# Altium PCB SmartChess_PCB.PcbDoc
Units mm, origin at the board's own origin, x right, y up, seen from the top; angles counter-clockwise.
Board outline 152.4 x 101.6 mm, 2 copper layers (Top Layer, Bottom Layer); 40 components, 108 nets, 335 pads, 68 vias.
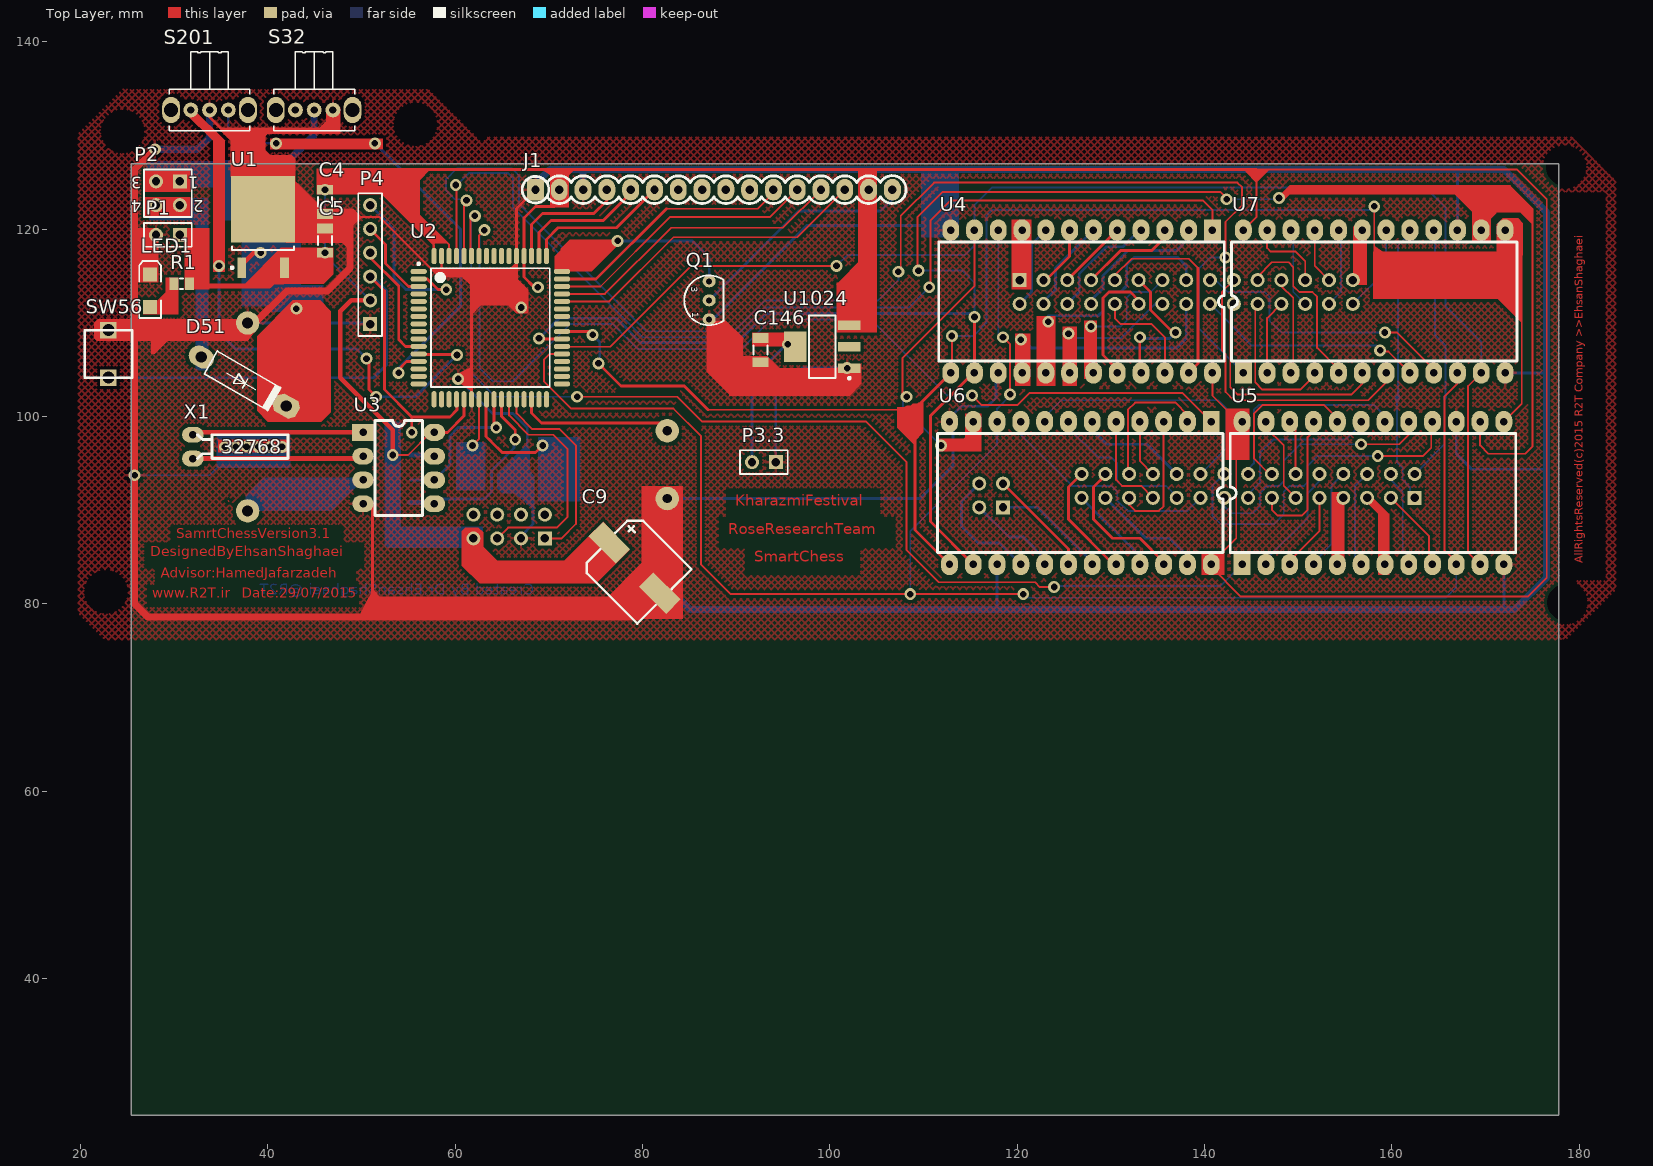
[diagram p0: Top Layer view]
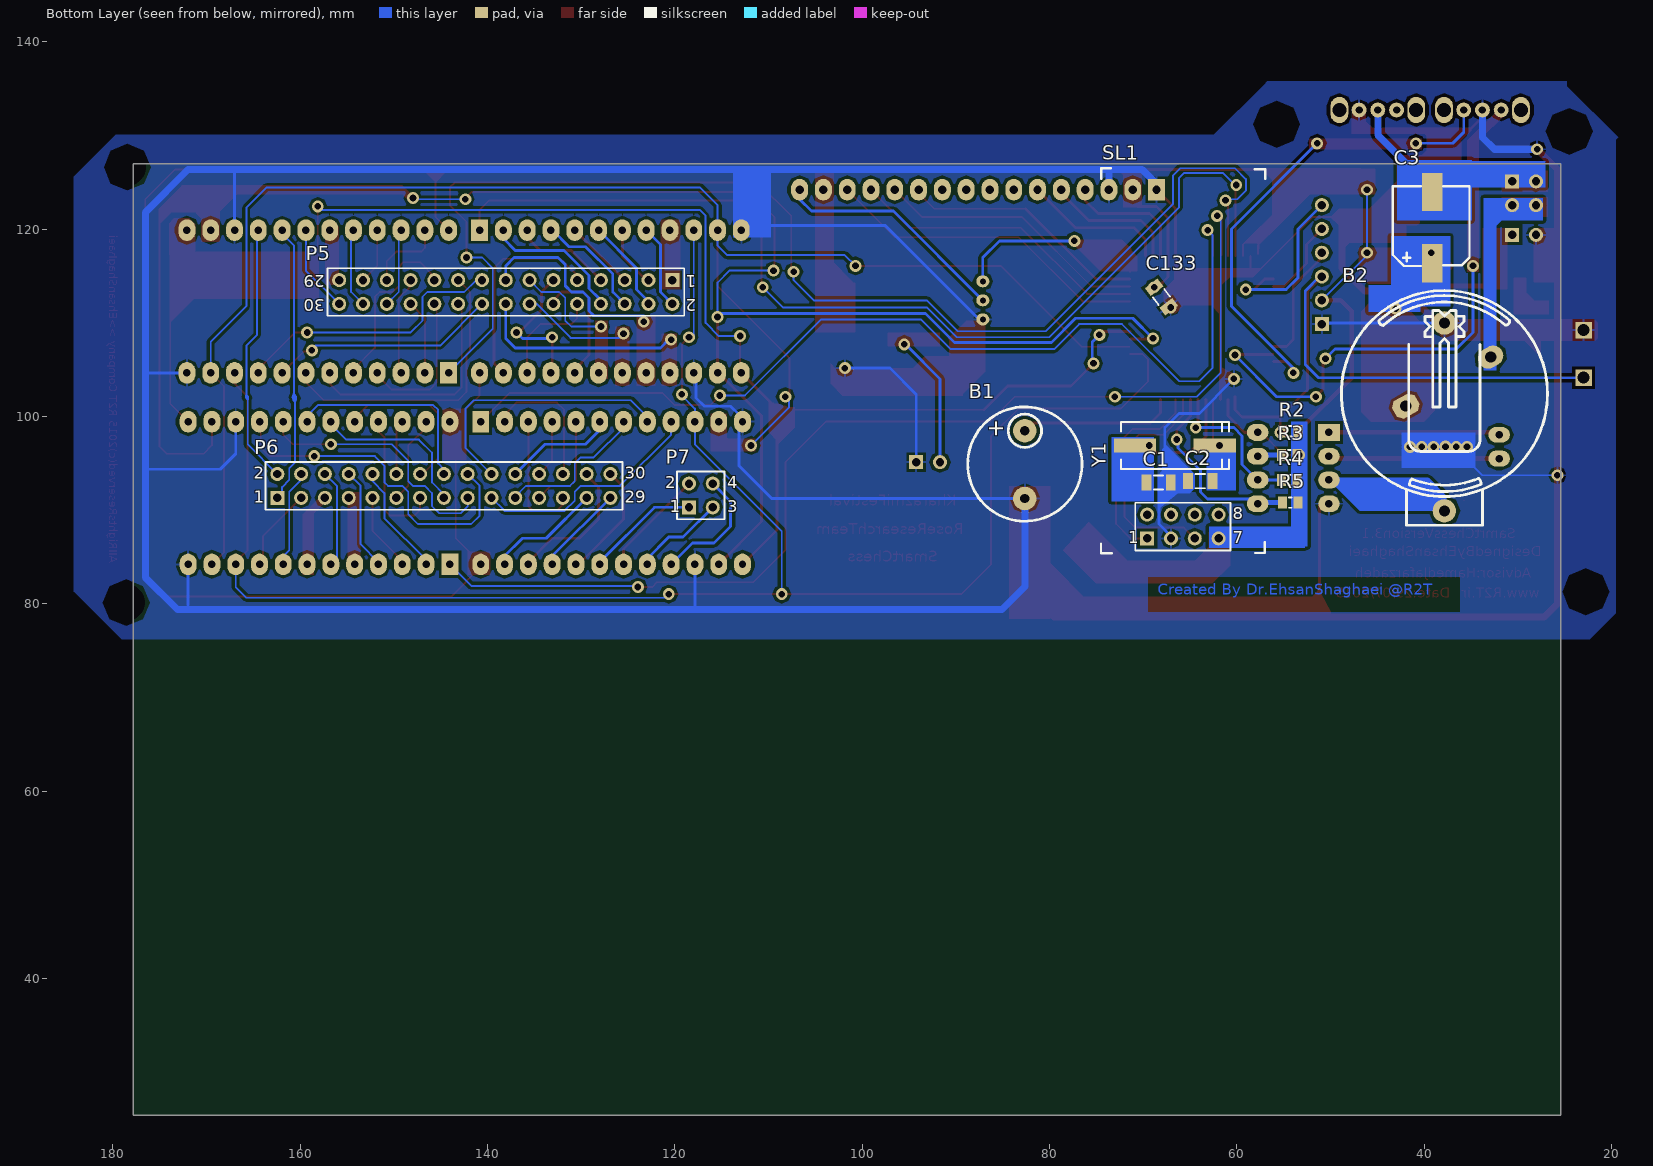
[diagram p1: Bottom Layer view, seen from below]
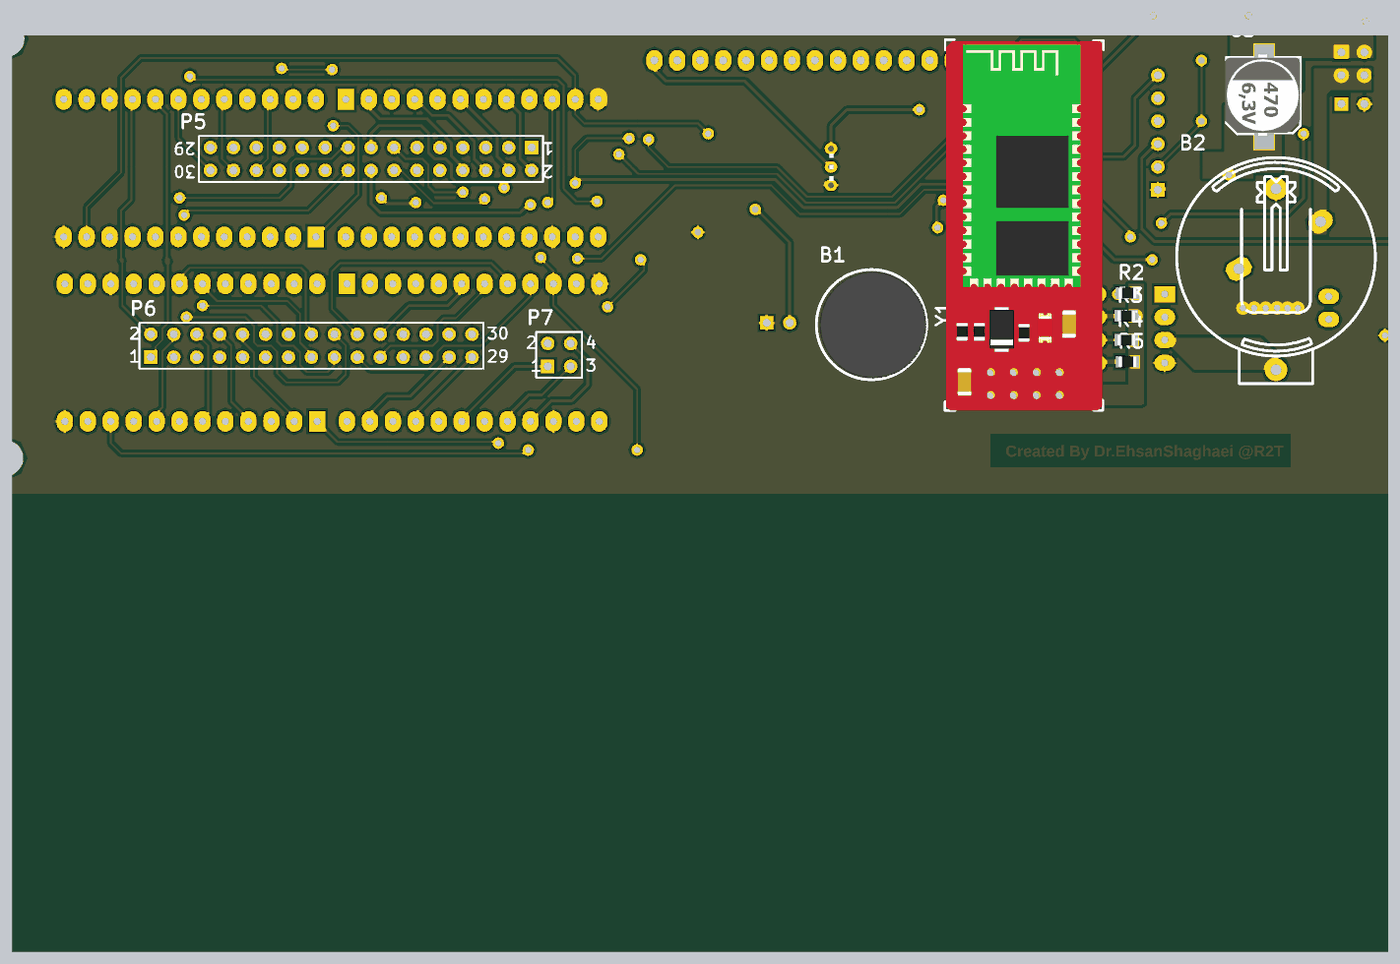
[diagram p2: 3D render of the assembled board from below, using the file's embedded part models]

## Layer stack, top to bottom
Top Solder: solder mask 0.0102, Solder Resist, Dk 3.5
Top Layer: signal copper 0.0356
Dielectric 1: dielectric 0.32, FR-4, Dk 4.8
Bottom Layer: signal copper 0.0356
Bottom Solder: solder mask 0.0102, Solder Resist, Dk 3.5

## Board outline
25.4,25.4 177.8,25.4 177.8,127 25.4,127

## Design rules (kind name [scope] priority, off if disabled: settings)
Clearance [All] p1: gap=0.3
PolygonConnect [All] p1: connectstyle=Relief reliefconductorwidth=0.254 reliefentries=4 polygonreliefangle="90 Angle" airgapwidth=0.254
RoutingVias [All] p1: holewidth=0.711 width=1.27 viastyle="Through Hole" minholewidth=0.711 minwidth=1.27 maxholewidth=0.711 maxwidth=1.27
SolderMaskExpansion [All] p1: expansion=0.102
Width [All] p1: maxlimit=1 minlimit=0.2 preferedwidth=0.3
29 further rules are at their usual default settings.

## Classes and differential pairs
component class SmartChessMultiplex_SCH: P5 P6 P7 U4 U5 U6 U7
component class SmartChess_SCH: B1 B2 C1 C2 C3 C4 C5 C9 C133 C146 D51 J1 LED1 P1 P2 P3.3 P4 Q1 Q? R1 R2 R3 R4 R5 S32 S201 SL1 SW56 U1 U2 U3 U1024 X1 Y1

## Components (designator, comment, footprint, x,y, rotation, side; value= is the part's Value field where it differs from the comment)
B1 "Buzzer" Buzzer 82.931,94.615 r90 bottom
B2 "BAT" BAT_H 37.846,89.916 r270 bottom
C1 "22pf" SMD_CAP_1206 69.652,92.964 r180 bottom
C2 "22pF" SMD_CAP_1206 62.611,93.091 r0 bottom
C3 "Capacitor Polarized" "Electrolytic Capacitor SMD Dia-8" 38.862,116.459 r90 bottom
C4 "100nF" SMD_CAP_1206 46.101,124.206 r270 top
C5 "300nf" SMD_CAP_1206 46.101,117.475 r90 top
C9 "Capacitor Polarized" "Electrolytic Capacitor SMD Dia-8" 76.327,86.233 r315 top
C133 "100pF" SMD_CAP_1206 68.834,113.792 r233 bottom
C146 "100nF" SMD_CAP_1206 92.583,105.791 r90 top
D51 "1N4007" My_DO-41 42.291,101.219 r150 top
J1 "SIP16" SIP16 68.58,124.206 r0 top
LED1 "Red" "LED SMD 1206" 27.432,113.411 r90 top
P1 "Header 2" HDR1X2 30.607,119.38 r180 top
P2 "Header 2X2" HDR2X2 30.607,125.095 r180 top
P3.3 "Header 2" HDR1X2 94.234,95.123 r180 top
P4 "Programmer" HDR1X6 50.927,109.855 r90 top
P5 "Header 15X2" HDR2X15 120.269,114.554 r0 bottom
P6 "Header 15X2" HDR2X15 162.433,91.313 r180 bottom
P7 "Header 2X2" HDR2X2 118.491,90.297 r180 bottom
Q1 "C945" C945 87.122,112.395 r270 top
R1 "330" "RES 0805 (2012X06L)" 29.972,114.173 r0 top
R2 "1K" "RES 0805 (2012X06L)" 53.467,98.425 r0 bottom
R3 "1K" "RES 0805 (2012X06L)" 55.245,95.885 r180 bottom
R4 "1K" "RES 0805 (2012X06L)" 55.245,93.218 r180 bottom
R5 "1K" "RES 0805 (2012X06L)" 55.118,90.805 r180 bottom
S32 "Switch SPDT_Subminiator" "SPDT Subminiator" 44.958,132.715 r0 top
S201 "Switch SPDT_Subminiator" "SPDT Subminiator" 33.782,132.715 r0 top
SL1 "R2T-SerialLink" "Bluetooth Serial" 66.675,87.376 r180 bottom
SW56 "SWITCH" SWITCH 22.987,106.68 r90 top
U1 "78M05" DPAK228P972X240-3N 39.497,120.269 r90 top
U2 "ATmega64-16AC" 64A_N 63.754,109.474 r0 top
U3 "DS1307" DIP8 50.165,98.298 r0 top
U4 "CD4067BE" DIP24 140.843,119.888 r270 top
U5 "CD4067BE" DIP24 144.018,84.201 r90 top
U6 "CD4067BE" DIP24 140.716,99.441 r270 top
U7 "CD4067BE" DIP24 144.145,104.648 r90 top
U1024 "LM1117IMP-x.x" MP04A_N 99.187,107.442 r180 top
X1 "XTAL" XTAL2 32.004,98.044 r270 top
Y1 "8Mhz" "Crystal SMD" 66.04,96.901 r0 bottom

## Footprints (in the part's own frame and the unit in brackets; to place one, negate y for a bottom-side part, rotate by r counter-clockwise, add the part's x,y. Pads: shape width x height; smd on the part's side, far side on the other; paste and mask are expansions set on the pad)
64A_N [mm] "Thin QFP, 64-Leads, Body 14x14mm, Pitch 0.8mm, IPC Medium Density"
  oval 1.75x0.55 smd: 1(-7.65,6) 2(-7.65,5.2) 3(-7.65,4.4) 4(-7.65,3.6) 5(-7.65,2.8) 6(-7.65,2) 7(-7.65,1.2) 8(-7.65,0.4) 9(-7.65,-0.4) 10(-7.65,-1.2) 11(-7.65,-2) 12(-7.65,-2.8) 13(-7.65,-3.6) 14(-7.65,-4.4) 15(-7.65,-5.2) 16(-7.65,-6) 33(7.65,-6) 34(7.65,-5.2) 35(7.65,-4.4) 36(7.65,-3.6) 37(7.65,-2.8) 38(7.65,-2) 39(7.65,-1.2) 40(7.65,-0.4) 41(7.65,0.4) 42(7.65,1.2) 43(7.65,2) 44(7.65,2.8) 45(7.65,3.6) 46(7.65,4.4) 47(7.65,5.2) 48(7.65,6)
  oval 0.55x1.75 smd: 17(-6,-7.65) 18(-5.2,-7.65) 19(-4.4,-7.65) 20(-3.6,-7.65) 21(-2.8,-7.65) 22(-2,-7.65) 23(-1.2,-7.65) 24(-0.4,-7.65) 25(0.4,-7.65) 26(1.2,-7.65) 27(2,-7.65) 28(2.8,-7.65) 29(3.6,-7.65) 30(4.4,-7.65) 31(5.2,-7.65) 32(6,-7.65) 49(6,7.65) 50(5.2,7.65) 51(4.4,7.65) 52(3.6,7.65) 53(2.8,7.65) 54(2,7.65) 55(1.2,7.65) 56(0.4,7.65) 57(-0.4,7.65) 58(-1.2,7.65) 59(-2,7.65) 60(-2.8,7.65) 61(-3.6,7.65) 62(-4.4,7.65) 63(-5.2,7.65) 64(-6,7.65)
  silkscreen extent -7.77,-6.35 6.35,6.95, body extent -7,-7 7,7, height 1.2
BAT_H [mm]
  round 2.5 hole 1.2: 1(0,0) 2(-20.066,0)
  silkscreen extent -23.52,-11 1.52,11
"Bluetooth Serial" [mm]
  rect 1.5x1.5 hole 0.9: 1(-2.9,-0.397)
  round 1.5 hole 0.9: 2(-2.9,2.143) 3(-0.36,-0.397) 4(-0.36,2.143) 5(2.18,-0.397) 6(2.18,2.143) 7(4.72,-0.397) 8(4.72,2.143)
  silkscreen extent -7.82,-1.98 9.72,39.12, body extent -7.73,-1.98 9.6,38.95, height 8.5
Buzzer [mm] "Magnetic Transducer"
  round 2.5 hole 1: 1(3.859,-0.297) 2(-3.38,-0.297)
  silkscreen extent -5.8,-6.39 6.4,5.8, body extent -5.67,-6.39 6.17,5.45, height 6.98
C945 [mil] "NPN Transistor"
  oval 50x55 hole 25: 1(80,0) 2(0,0) 3(-80,0)
  silkscreen extent -105,-105 105,61, body extent -94,-96 95,58, height 315
"Crystal SMD" [mm]
  rect 4.5x1.5 smd: 1(-3.683,0) 2(4.817,0)
  silkscreen extent -5.18,-2.5 6.32,2.5, body extent -5.64,-2.25 6.66,2.25, height 5.18
DIP8 [mm]
  rect 2.3x1.8 hole 0.8: 1(0,0)
  oval 2.3x1.8 hole 0.8: 2(0,-2.54) 3(0,-5.08) 4(0,-7.62) 5(7.62,-7.62) 6(7.62,-5.08) 7(7.62,-2.54) 8(7.62,0)
  silkscreen extent 1.27,-8.89 6.35,1.27
DIP24 [mm]
  rect 2.3x1.8 hole 0.8: 1(0,0)
  oval 2.3x1.8 hole 0.8: 2(0,-2.54) 3(0,-5.08) 4(0,-7.62) 5(0,-10.16) 6(0,-12.7) 7(0,-15.24) 8(0,-17.78) 9(0,-20.32) 10(0,-22.86) 11(0,-25.4) 12(0,-27.94) 13(15.24,-27.94) 14(15.24,-25.4) 15(15.24,-22.86) 16(15.24,-20.32) 17(15.24,-17.78) 18(15.24,-15.24) 19(15.24,-12.7) 20(15.24,-10.16) 21(15.24,-7.62) 22(15.24,-5.08) 23(15.24,-2.54) 24(15.24,0)
  silkscreen extent 1.27,-29.21 13.97,1.27
DPAK228P972X240-3N [mm] "D-PAK, 3-Pads, Body 6.20x6.66mm (max), IPC Medium Density"
  rect 2.15x0.95 smd: 1(-4.4,2.28) 3(-4.4,-2.28)
  rect 7.1x6.8 smd: 2(1.85,0)
  silkscreen extent -4.52,-3.3 -2.1,3.43, body extent -4.95,-3.43 5.15,3.3, height 2.37
"Electrolytic Capacitor SMD Dia-8" [mm] "470uf,6.3v,16v"
  rect 4.1x2.2 smd: 1(-0.1,0.3) 2(7.5,0.3)
  silkscreen extent -0.4,-3.7 8.1,4.5, body extent -0.6,-3.7 8.4,4.6, height 11.9
HDR1X2 [mm] "Connector; Header; 2 Position"
  rect 1.5x1.5 hole 0.9: 1(0,0)
  round 1.5 hole 0.9: 2(2.54,0)
  silkscreen extent -1.27,-1.27 3.81,1.27
HDR1X6 [mm] "Connector; Header; 6 Position"
  rect 1.5x1.5 hole 0.9: 1(0,0)
  round 1.5 hole 0.9: 2(2.54,0) 3(5.08,0) 4(7.62,0) 5(10.16,0) 6(12.7,0)
  silkscreen extent -1.27,-1.27 13.97,1.27
HDR2X2 [mm] "Connector; Header; 2x2 Position"
  rect 1.5x1.5 hole 0.9: 1(0,0)
  round 1.5 hole 0.9: 2(0,2.54) 3(2.54,0) 4(2.54,2.54)
  silkscreen extent -1.27,-1.27 3.81,3.81
HDR2X15 [mm] "Connector; Header; 15x2 Position"
  rect 1.5x1.5 hole 0.9: 1(0,0)
  round 1.5 hole 0.9: 2(0,2.54) 3(2.54,0) 4(2.54,2.54) 5(5.08,0) 6(5.08,2.54) 7(7.62,0) 8(7.62,2.54) 9(10.16,0) 10(10.16,2.54) 11(12.7,0) 12(12.7,2.54) 13(15.24,0) 14(15.24,2.54) 15(17.78,0) 16(17.78,2.54) 17(20.32,0) 18(20.32,2.54) 19(22.86,0) 20(22.86,2.54) 21(25.4,0) 22(25.4,2.54) 23(27.94,0) 24(27.94,2.54) 25(30.48,0) 26(30.48,2.54) 27(33.02,0) 28(33.02,2.54) 29(35.56,0) 30(35.56,2.54)
  silkscreen extent -1.27,-1.27 36.83,3.81
"LED SMD 1206" [mm]
  rect 1.5x1.5 smd: 1(-1.75,0) 2(1.75,0)
  silkscreen extent -2.9,-1.15 3.2,1.15, body extent -1.65,-0.76 1.65,0.69, height 1.36
MP04A_N [mm] "SOT223, 4-Leads, Body 6.5x3.5mm, Pitch 2.3mm, Lead Span 7mm, IPC Medium Density"
  rect 2.4x1 smd: 1(-2.9,2.3) 2(-2.9,0) 3(-2.9,-2.3)
  rect 2.4x3.3 smd: 4(2.9,0)
  silkscreen extent -3.03,-3.35 1.4,3.47, body extent -3.49,-3.24 3.49,3.24, height 1.64
My_DO-41 [mil]
  oval 110x85 hole 47.24: A(420.71,10)
  oct 110x85 hole 47.24: K(8.9,10)
  silkscreen extent 64,-45 375,65
"RES 0805 (2012X06L)" [mm] "Chip Resistor, 2-Leads, Body 2.0x1.3mm, IPC High Density _ (0.100 W)"
  rect 0.95x1.3 smd: 1(0,0) 2(1.65,0)
  silkscreen extent 0.67,-0.55 0.98,0.55, body extent -0.19,-0.63 1.84,0.64, height 0.6
SIP16 [mm]
  rect 1.8x2.3 hole 0.9: 1(0,0)
  oval 1.8x2.3 hole 0.9: 2(2.54,0) 3(5.08,0) 4(7.62,0) 5(10.16,0) 6(12.7,0) 7(15.24,0) 8(17.78,0) 9(20.32,0) 10(22.86,0) 11(25.4,0) 12(27.94,0) 13(30.48,0) 14(33.02,0) 15(35.56,0) 16(38.1,0)
  silkscreen extent -1.42,-1.48 39.56,1.5
SMD_CAP_1206 [mm]
  rect 1.05x1.7 smd: 1(0,0) 2(2.596,0)
  silkscreen extent 0.8,-0.75 1.8,0.75, body extent -0.22,-0.77 2.82,0.75, height 0.75
"SPDT Subminiator" [mm] "Subminiator SPDT switch"
  round 1.6 hole 0.8: 1(2,0) 2(0,0) 3(-2,0)
  oval 1.9x2.8 hole 1.5: M2(-4.1,0) M2(4.1,0)
  silkscreen extent -4.3,-2.2 4.3,6.2, body extent -4.31,-2.28 4.3,6.09, height 4.7
SWITCH [mil]
  rect 70x70 hole 50: 1(100,0) 2(-100,0)
  silkscreen extent -100,-100 100,100
XTAL2 [mm]
  oval 1.7x2.3 hole 0.8: 1(0,0) 2(2.54,0)
  silkscreen extent 0,0.51 2.54,10.16

## Part data
C1 C2 C4 C5 C133 C146: library part Cap-Bipolar, "Bipolar Capacitor"
D51: "1 Amp Diode"
LED1: library part LED, "LED"
P1 P3.3: "Header, 2-Pin"
P2 P7: "Header, 2-Pin, Dual row"
P4: library part "Header 6", "Header, 6-Pin"
P5 P6: "Header, 15-Pin, Dual row"
Q1: "NPN Transistor"
R1 R2 R3 R4 R5: library part Resistor, "Resistor"
S32 S201: "Subminiator SPDT Switch"
U2: "8-Bit AVR Microcontroller with 64K Bytes of In-System Programmable Flash Memory"
U1024: "x.x Volt, 800mA Low-Dropout Linear Regulator, 4-pin SOT-223"
Y1: library part XTAL, "XTAL Crystal"

## Free pads (board coordinates)
  round 1.524 hole 4: 1(24.511,130.429) 1(55.753,131.191) 2(178.435,126.619) 3(178.562,80.137) 8(22.733,81.28)

## Via types
v1: diameter 1.27, hole 0.711, Top Layer to Bottom Layer, 68 vias

## Nets (pads, with @x,y where several pads share a name; then routed paths per layer and width w, separated by ;. In a path a pad name is that pad's centre, name@x,y a point inside that pad or via, vN(x,y) a via of type N, cw(c..) or ccw(c..) an arc to the next point about the centre after c; other vN are vias at no path point)
3.3V: C146.2 P3.3.2 U1024.4 | length 17.1
  Top Layer w0.3: C146.2 U1024.4@95.342,108.387
  Bottom Layer w0.3: P3.3.2 91.694,104.013 95.186,107.505 v1@95.694,107.505
  other v1: 95.504,107.696
GND: B1.2 B2.2 C1.2 C2.2 C4.2 C5.2 C9.2 C133.2 C146.1 J1.1 J1.3 LED1.2 P1.2 P3.3.1 P4.1 Q1.1 S32.1 S201.2 SL1.3 SW56.1 U1.2 U2.22 U2.53 U2.63 U3.4 U4.12 U4.15 U5.12 U5.15 U6.12 U6.15 U7.12 U7.15 U1024.1 | length 724.8
  Top Layer w0.2: C4.2@46.101,121.285 51.943,121.285 58.293,114.935 58.554,114.935 ; U2.63 58.554,114.935 ; 66.548,114.935 58.554,114.935
  Top Layer w0.3: SW56.1 25.781,109.22 ; 25.781,109.093 36.957,109.093 B2.2 ; S201.2 33.782,131.953 35.052,130.683 39.497,130.683 ; U1.2 39.497,130.683 ; S32.1 46.958,132.048 45.593,130.683 39.497,130.683 ; 51.181,79.121 U3.4@51.181,90.678 ; v1(60.325,104.013) 61.754,104.013 ; U2.22 61.754,104.013 ; 61.754,114.84 61.754,104.013 ; v1(67.056,111.633) 67.056,111.887 66.554,112.389 U2.53 66.554,122.18 J1.1 ; Q1.1 87.122,104.775 89.408,102.489 100.711,102.489 102.087,103.865 U1024.1 ; 92.583,102.616 C146.1 ; v1(101.854,105.156) U1024.1@101.868,105.142
  Top Layer w0.75: LED1.2 26.063,115.161 25.781,115.443 ; v1(27.94,128.524) 25.781,126.365 25.781,119.38 ; P1.2 25.781,119.38 ; B2.2 38.608,109.982 42.037,113.411 46.355,113.411 48.768,115.824 48.768,119.38 47.371,120.777 U1.2@40.839,120.777 ; B1.2 82.634,81.745 79.502,78.613 27.178,78.613 25.781,80.01 v1(25.781,93.726) 25.781,115.443 ; 25.781,115.443 25.781,119.38
  Bottom Layer w0.2: v1(25.781,93.726) 33.782,93.726 35.433,95.377 v1(35.433,96.754)
  Bottom Layer w0.3: B2.2 P4.1@50.8,109.982 ; v1@60.452,103.886 64.008,100.33 66.167,100.33 67.691,98.806 67.691,95.575 C2.2 66.929,93.091 C1.2 68.326,91.694 68.326,88.502 67.035,87.211 SL1.3 ; B1.2 109.65,91.235 113.157,94.742 113.157,100.203 114.046,101.092 116.84,101.092 117.729,101.981 117.729,104.14 117.856,104.14 U4.15@118.618,104.902 ; Q1.1 87.503,110.363 97.536,120.396 U4.12@112.395,120.396 ; P3.3.1 94.234,102.362 97.028,105.156 v1(101.854,105.156) ; U4.12 112.903,125.984 ; 117.856,79.375 U6.15 ; U5.15 166.878,96.012 168.529,94.361 176.53,94.361 ; U7.15 167.005,126.365 ; 171.958,79.883 U5.12 ; U7.12 176.149,104.648
  Bottom Layer w0.75: v1(27.94,128.524) 32.512,128.524 33.782,129.794 S201.2 ; J1.1@68.58,124.841 70.104,126.365 171.958,126.365 176.53,121.793 176.53,94.361 176.53,82.804 173.101,79.375 117.856,79.375 85.09,79.375 82.634,81.831 B1.2 ; J1.3@73.66,124.841 73.66,126.365
  other v1: 36.576,96.754 38.989,96.754 40.259,96.754 41.509,96.754 37.719,96.774
HALL1: P5.1 U4.9 | length 5.4
  Top Layer w0.3: P5.1 120.523,114.808 U4.9
HALL2: P5.2 U4.8 | length 9
  Bottom Layer w0.3: P5.2 121.539,113.284 121.539,118.364 U4.8
HALL3: P5.3 U4.7 | length 6.6
  Top Layer w0.3: P5.3 123.063,114.554 125.603,117.094 U4.7
HALL4: P5.4 U4.6 | length 10.1
  Bottom Layer w0.3: P5.4 122.809,112.268 124.079,113.538 124.079,115.824 U4.6
HALL5: P5.5 U4.5 | length 7.5
  Top Layer w0.3: P5.5 U4.5
HALL6: P5.6 U4.4 | length 12.3
  Bottom Layer w0.3: P5.6 126.619,113.284 126.619,115.189 129.54,118.11 131.297,118.11 133.075,119.888 U4.4
HALL7: P5.7 U4.3 | length 10.5
  Top Layer w0.3: P5.7 131.064,117.729 134.366,117.729 135.763,119.126 U4.3
HALL8: P5.8 U4.2 | length 14.9
  Bottom Layer w0.3: P5.8@128.016,112.268 128.016,112.522 129.159,113.665 129.159,115.062 131.826,117.729 137.033,117.729 138.303,118.999 U4.2
HALL9: P5.9 U4.23 | length 22.2
  Top Layer w0.2: P5.9 130.429,115.062 132.207,116.84 138.303,116.84 139.319,115.824
  Top Layer w0.3: U4.23 139.319,105.664 139.319,115.824
HALL10: P5.10 U4.22 | length 12.3
  Top Layer w0.2: P5.10 130.429,110.49 131.064,109.855 134.366,109.855 135.763,108.458 U4.22 U4.22@135.763,105.41
HALL11: P5.11 U4.21 | length 15.2
  Top Layer w0.2: v1@136.652,108.966 v1(136.906,108.966)
  Top Layer w0.3: P5.11 134.239,113.284 134.239,111.379 v1@136.652,108.966 ; U4.21@133.096,104.775 v1(133.096,108.458)
  Bottom Layer w0.2: v1(133.096,108.458) v1@133.223,108.331
  Bottom Layer w0.3: v1@133.223,108.331 136.271,108.331 v1(136.906,108.966)
HALL12: P5.12 U4.20 | length 13.5
  Top Layer w0.3: U4.20 130.683,105.029 129.159,106.553 129.159,112.649 129.794,113.284 132.08,113.284 132.969,112.395 P5.12
HALL13: P5.13 U4.19 | length 16.1
  Top Layer w0.2: v1(127.889,109.601) 128.143,109.347 U4.19
  Bottom Layer w0.2: v1(127.889,109.601) 131.064,109.601 131.699,110.236 131.699,112.649 132.334,113.284 134.239,113.284 P5.13
HALL14: P5.14 U4.18 | length 16
  Top Layer w0.2: v1(125.476,108.839) 125.476,104.775 U4.18
  Bottom Layer w0.2: v1(125.476,108.839) 125.93,108.385 131.118,108.385 134.747,112.014 P5.14
HALL15: P5.15 U4.17 | length 27.5
  Top Layer w0.2: U4.17 123.063,109.855 v1(123.317,110.109)
  Bottom Layer w0.2: v1(123.317,110.109) 123.317,110.744
  Bottom Layer w0.3: 123.317,110.744 128.651,110.744 129.159,111.252 129.159,112.649 129.794,113.284 131.03,113.284 131.699,113.953 131.699,116.205 132.461,116.967 137.16,116.967 138.049,116.078 P5.15
HALL16: P5.16 U4.16 | length 25.6
  Top Layer w0.2: U4.16@120.396,104.775 v1(120.396,108.204)
  Bottom Layer w0.3: v1(120.396,108.204) 120.65,108.204 121.539,107.315 137.033,107.315 138.049,108.331 P5.16
HALL17: P5.17 U7.9 | length 30.3
  Top Layer w0.2: v1(159.258,108.966) 160.528,108.966 164.465,105.029 U7.9
  Bottom Layer w0.2: P5.17 141.224,114.554 142.494,113.284 146.431,113.284 146.939,112.776 146.939,110.236 148.209,108.966 159.131,108.966 159.258,109.093 v1@159.766,109.093
HALL18: P5.18 U7.8 | length 24.6
  Top Layer w0.2: v1(158.75,107.061) 158.877,106.934 159.639,106.934 U7.8
  Bottom Layer w0.2: P5.18 145.034,107.569 158.369,107.569 158.877,107.061 v1(158.75,107.061)
HALL19: P5.19 U7.7 | length 31.9
  Top Layer w0.2: P5.19 141.859,113.284 141.859,107.061 142.24,106.68 142.24,102.616 143.129,101.727 157.48,101.727 159.385,103.632 U7.7
HALL20: P5.20 U7.6 | length 25.1
  Top Layer w0.2: P5.20 142.748,111.633 142.748,103.124 143.51,102.362 155.702,102.362 156.845,103.505 U7.6
HALL21: P5.21 U7.5 | length 19.2
  Top Layer w0.2: P5.21 145.669,114.935 147.193,116.459 148.971,116.459 149.479,115.951 149.479,113.919 150.114,113.284 151.511,113.284 152.019,112.776 152.019,107.315 154.305,105.029 U7.5
HALL22: P5.22 U7.4 | length 16
  Top Layer w0.2: P5.22 145.415,111.76 145.415,103.632 146.177,102.87 150.241,102.87 151.765,104.394 U7.4
HALL23: P5.23 U7.3 | length 10.5
  Top Layer w0.2: P5.23 148.209,113.919 149.479,112.649 149.479,104.902 U7.3
HALL24: P5.24 U7.2 | length 8
  Top Layer w0.2: U7.2 146.685,110.49 P5.24
HALL25: P5.25 U7.23 | length 8.6
  Top Layer w0.2: U7.23 146.685,117.983 147.066,117.602 149.733,117.602 150.749,116.586 P5.25
HALL26: P5.26 U7.22 | length 8.5
  Bottom Layer w0.2: U7.22 149.479,119.634 149.479,113.284 P5.26
HALL27: P5.27 U7.21 | length 6
  Top Layer w0.2: U7.21 151.765,116.078 P5.27
HALL28: P5.28 U7.20 | length 8.5
  Bottom Layer w0.2: P5.28 154.559,113.284 154.559,119.634 U7.20
HALL29: P5.29 U7.19 | length 5.8
  Top Layer w0.2: P5.29 156.845,115.57 U7.19
HALL30: P5.30 U7.18 | length 9.3
  Bottom Layer w0.2: P5.30 159.385,115.57 U7.18
HALL31: P6.1 U7.17 | length 32.2
  Bottom Layer w0.2: U7.17 161.925,119.507 160.671,118.253 160.671,101.87 160.544,101.743 160.544,95.095 161.163,94.476 161.163,93.225 161.925,92.463 161.925,91.821 P6.1
  Bottom Layer w0.254: 160.544,101.743 cw(c160.671,101.743) 160.671,101.87 ; 160.544,101.743 ccw(c160.544,101.87) 160.671,101.87 ; 160.544,101.743 ccw(c160.544,101.87) 160.671,101.87 ; 160.544,101.6 cw(c160.989,101.917) 160.671,102.362 cw(c160.227,102.044) 160.544,101.6
HALL32: P6.2 U7.16 | length 28.8
  Bottom Layer w0.2: P6.2 165.592,97.012 165.592,101.854 165.735,101.997 165.735,107.569 164.592,108.712 U7.16@164.592,119.888
  Bottom Layer w0.254: 165.592,101.854 cw(c165.854,101.973) 165.735,102.235 cw(c165.473,102.116) 165.592,101.854
HALL33: P6.3 U5.9 | length 9
  Top Layer w0.2: P6.3 163.957,87.249 163.957,84.582 U5.9
HALL34: P6.4 U5.8 | length 10.4
  Bottom Layer w0.2: P6.4 159.893,93.218 161.163,91.948 161.163,85.725 161.798,85.09 U5.8
HALL35: P6.5 U5.7 | length 7.9
  Top Layer w0.2: P6.5 159.258,89.408 U5.7
HALL36: P6.6 U5.6 | length 10.4
  Bottom Layer w0.2: U5.6 156.083,84.836 156.083,92.583 P6.6
HALL37: P6.7 U5.5 | length 7.4
  Top Layer w0.2: U5.5 154.178,90.678 P6.7
HALL38: P6.8 U5.4 | length 11
  Bottom Layer w0.2: U5.4 151.638,84.455 153.543,86.36 153.543,92.583 P6.8
HALL39: P6.9 U5.3 | length 8.4
  Top Layer w0.2: U5.3 149.098,84.582 152.273,87.757 P6.9
HALL40: P6.10 U5.2 | length 12
  Bottom Layer w0.2: U5.2 146.558,84.709 151.003,89.154 151.003,91.821 152.273,93.091 P6.10
HALL41: P6.11 U5.23 | length 9.4
  Top Layer w0.2: U5.23 146.558,98.806 148.463,96.901 148.463,92.583 P6.11
HALL42: P6.12 U5.22 | length 5.5
  Top Layer w0.2: U5.22 149.733,98.806 P6.12@149.733,94.234
HALL43: P6.13 U5.21 | length 15.3
  Top Layer w0.2: P6.13 147.193,90.043 147.828,89.408 150.368,89.408 151.003,90.043 151.003,97.79 151.638,98.425 U5.21
HALL44: P6.14 U5.20 | length 17.6
  Top Layer w0.2: P6.14 146.939,93.853 145.288,95.504 145.288,100.33 146.177,101.219 152.781,101.219 154.178,99.822 U5.20
HALL45: P6.15 U5.19 | length 17.7
  Bottom Layer w0.2: P6.15 144.653,91.694 145.923,92.964 145.923,96.139 147.32,97.536 155.067,97.536 156.718,99.187 U5.19
HALL46: P6.16 U5.18 | length 22.4
  Bottom Layer w0.2: P6.16 144.653,94.361 145.272,94.98 145.272,100.695 145.796,101.219 158.115,101.219 159.258,100.076 U5.18
HALL47: P6.17 U5.17 | length 27.3
  Top Layer w0.2: v1(156.718,97.028) 160.782,97.028 161.798,98.044 U5.17
  Bottom Layer w0.2: P6.17@142.113,90.805 142.113,90.424 142.875,89.662 145.161,89.662 145.923,90.424 145.923,91.821 146.685,92.583 147.955,92.583 148.463,93.091 148.463,95.25 150.241,97.028 v1(156.718,97.028)
HALL48: P6.18 U5.16 | length 37.4
  Top Layer w0.2: v1(158.496,95.758) 163.322,95.758 164.211,96.647 164.211,99.314 U5.16
  Bottom Layer w0.2: P6.18 140.843,92.583 140.843,89.408 141.732,88.519 147.447,88.519 148.463,89.535 148.463,91.948 149.098,92.583 150.622,92.583 151.003,92.964 151.003,94.742 152.019,95.758 v1(158.496,95.758)
HALL49: P6.19 U6.9 | length 25.1
  Bottom Layer w0.2: U6.9 120.396,98.044 125.857,92.583 130.048,92.583 130.683,91.948 130.683,91.022 131.789,89.916 138.176,89.916 P6.19
HALL50: P6.20 U6.8 | length 29.2
  Bottom Layer w0.2: U6.8 122.936,99.949 124.714,101.727 141.478,101.727 142.367,100.838 142.367,96.647 P6.20
HALL51: P6.21 U6.7 | length 16.4
  Bottom Layer w0.2: U6.7 125.476,98.806 128.651,95.631 130.048,95.631 130.683,94.996 130.683,93.091 131.191,92.583 135.89,92.583 P6.21@137.033,91.44
HALL52: P6.22 U6.6 | length 12.6
  Top Layer w0.2: U6.6 U6.6@128.016,100.203
  Bottom Layer w0.3: U6.6 128.016,98.552 129.54,97.028 133.858,97.028 P6.22
HALL53: P6.23 U6.5 | length 10.9
  Top Layer w0.2: U6.5 130.556,93.218 131.191,92.583 133.223,92.583 P6.23
HALL54: P6.24 U6.4 | length 6.2
  Top Layer w0.2: U6.4 133.096,95.25 P6.24
HALL55: P6.25 U6.3 | length 13.9
  Top Layer w0.2: P6.25 131.953,90.551 132.588,89.916 135.128,89.916 135.636,90.424 U6.3
HALL56: P6.26 U6.2 | length 14.8
  Top Layer w0.2: P6.26@131.699,94.107 P6.26 ; P6.26@131.826,94.234 131.826,100.711 132.588,101.473 136.906,101.473 138.176,100.203 U6.2
HALL57: P6.27 U6.23 | length 12.2
  Bottom Layer w0.3: P6.27 133.731,86.995 136.271,86.995 138.176,85.09 U6.23
HALL58: P6.28 U6.22 | length 15
  Top Layer w0.3: P6.28 129.413,93.726 128.143,92.456 128.143,89.027 130.175,86.995 133.096,86.995 135.636,84.455 U6.22
HALL59: P6.29 U6.21 | length 9.7
  Bottom Layer w0.3: P6.29 133.096,85.09 U6.21
HALL60: P6.30 U6.20 | length 12.5
  Top Layer w0.3: P6.30 125.476,92.456 125.476,89.027 130.302,84.201 U6.20
HALL61: P7.1 U6.19 | length 12.2
  Bottom Layer w0.3: P7.1 122.174,90.297 128.016,84.455 U6.19
HALL62: P7.2 U6.18 | length 11.5
  Top Layer w0.3: P7.2 125.476,85.852 U6.18
HALL63: P7.3 U6.17 | length 9.9
  Bottom Layer w0.3: P7.3 119.126,87.122 120.65,87.122 122.936,84.836 U6.17
HALL64: P7.4 U6.16 | length 13.4
  Bottom Layer w0.3: P7.4 114.046,90.932 114.046,88.265 115.824,86.487 118.11,86.487 U6.16
INSENSOR1: U2.61 U4.1 | length 112.1
  Top Layer w0.2: v1(60.071,124.714) 59.817,124.714 59.69,124.587 60.154,124.123 U2.61 ; v1(110.617,113.792) 110.744,113.919 110.744,120.904 112.903,123.063 139.827,123.063 140.843,122.047 U4.1
  Bottom Layer w0.2: v1(60.071,124.714) 59.817,124.714 59.69,124.587 60.071,124.587 61.468,125.984 65.659,125.984 66.167,125.476 66.167,122.318 80.027,108.458 89.916,108.458 93.091,111.633 108.458,111.633 v1(110.617,113.792)
INSENSOR2: U2.60 U7.1 | length 139.6
  Top Layer w0.2: U2.60 60.954,122.803 v1(61.214,123.063) ; v1(107.315,115.443) 107.569,115.697 107.569,121.412 111.125,124.968 143.51,124.968 144.018,124.46 144.018,122.555 142.24,120.777 v1(142.24,116.967)
  Bottom Layer w0.2: v1(61.214,123.063) 61.087,123.19 59.944,123.19 59.036,124.098 59.036,125.33 60.198,126.492 66.04,126.492 66.802,125.73 66.802,122.682 80.391,109.093 89.789,109.093 93.091,112.395 105.156,112.395 107.315,114.554 v1(107.315,115.443) ; v1(142.24,116.967) 140.582,116.967 139.439,115.824 139.439,109.354 U7.1
INSENSOR3: U2.59 U5.1 | length 119.9
  Top Layer w0.2: U2.59@61.629,117.249 61.629,121.412 v1(62.103,121.412) ; v1(73.025,102.108) 83.693,102.108 86.36,99.441 103.886,99.441 108.204,95.123 108.204,85.725 111.633,82.296 121.92,82.296 122.428,81.788 v1(123.952,81.788)
  Bottom Layer w0.2: v1(62.103,121.412) 61.976,121.412 61.722,121.158 61.722,104.648 64.262,102.108 v1(73.025,102.108) ; v1(123.952,81.788) 124.079,81.915 141.732,81.915 U5.1
INSENSOR4: U2.58 U6.1 | length 107.1
  Top Layer w0.2: U2.58 62.554,119.323 v1(63.119,119.888) ; v1(115.189,102.235) 116.205,101.219 120.015,101.219 121.285,102.489 137.668,102.489 U6.1
  Bottom Layer w0.2: v1(63.119,119.888) 62.611,119.38 62.611,105.156 64.008,103.759 66.167,103.759 72.263,109.855 76.835,109.855 79.502,107.188 90.551,107.188 93.726,110.363 104.394,110.363 112.522,102.235 v1(115.189,102.235)
NetB1_1: B1.1 U2.30 | length 16.7
  Top Layer w0.3: U2.30 68.154,100.375 69.215,99.314 81.794,99.314 B1.1
NetB2_1: B2.1 U3.3 | length 14.8
  Bottom Layer w0.5: B2.1 37.846,91.44 39.624,93.218 U3.3 U3.3@50.419,93.218
NetC3_1: C3.1 D51.K U1.1 | length 21.3
  Top Layer w0.5: U1.1 37.217,116.211 38.481,117.475 v1(39.243,117.475) ; D51.K 43.053,102.197 v1(43.053,111.506)
  Bottom Layer w0.5: v1(39.243,117.475) 39.243,115.316 v1(43.053,111.506)
NetC3_2: C3.2 P2.1 P2.3 S32.2 | length 22.8
  Bottom Layer w0.75: P2.3 P2.1 38.242,125.095 C3.2@39.251,124.086 ; C3.2 39.162,124.252 44.958,130.048 S32.2
NetD51_A: D51.A P2.2 P2.4 | length 19.7
  Bottom Layer w0.75: P2.4 P2.2 32.91,120.252 D51.A
NetJ1_4: J1.4 U2.51 | length 13.8
  Top Layer w0.3: U2.51@68.275,117.245 U2.51 68.154,120.478 69.342,121.666 74.803,121.666 76.2,123.063 J1.4
NetJ1_5: J1.5 U2.50 | length 14.4
  Top Layer w0.3: U2.50 68.954,119.627 70.231,120.904 75.819,120.904 78.74,123.825 J1.5
NetJ1_6: J1.6 U2.49 | length 15.5
  Top Layer w0.3: U2.49 69.754,118.903 70.993,120.142 77.216,120.142 J1.6
NetJ1_11: J1.11 U2.47 | length 26.7
  Top Layer w0.2: 82.55,122.174 92.329,122.174 93.98,123.825 J1.11
  Top Layer w0.3: U2.47 75.05,114.674 82.55,122.174
NetJ1_12: J1.12 U2.46 | length 29.4
  Top Layer w0.2: U2.46 75.52,113.874 82.931,121.285 93.599,121.285 J1.12
NetJ1_13: J1.13 U2.45 | length 32.3
  Top Layer w0.2: U2.45 75.99,113.074 83.058,120.142 94.996,120.142 J1.13
NetJ1_14: J1.14 U2.44 | length 35.1
  Top Layer w0.2: U2.44 76.46,112.274 83.312,119.126 96.52,119.126 J1.14
NetJ1_16: J1.16 Q1.2 | length 25
  Bottom Layer w0.3: Q1.2 96.647,121.92 105.41,121.92 106.68,123.19 J1.16
NetLED1_1: LED1.1 R1.1 | length 3.8
  Top Layer w0.5: LED1.1 27.841,111.661 29.972,113.792 R1.1
NetQ1_3: Q1.3 U2.48 | length 21.8
  Top Layer w0.3: U2.48 71.404,117.886 72.263,118.745 v1(77.343,118.745)
  Bottom Layer w0.3: v1(77.343,118.745) 85.344,118.745 87.122,116.967 Q1.3
NetR3_1: R3.1 U3.7 | length 2.8
  Bottom Layer w0.5: R3.1 57.912,95.885 U3.7@58.039,95.758
NetS201_1: S201.1 U2.13 | length 52.5
  Top Layer w0.3: v1(40.894,129.159) v1(51.435,129.159) ; v1(53.975,104.648) 53.975,105.029 54.82,105.874 U2.13
  Bottom Layer w0.3: S201.1 35.782,130.334 36.957,129.159 v1(40.894,129.159) ; v1(51.435,129.159) 60.579,120.015 60.579,111.76 53.975,105.156 53.975,104.902 v1@54.229,104.648
NetS201_3: S201.3 U2.12 | length 61.3
  Top Layer w0.3: S201.3 31.782,132.429 34.671,129.54 34.671,116.332 34.417,116.078 v1(34.798,116.078) ; v1(50.546,106.172) 50.8,105.918 50.8,102.87 v1(51.562,102.108) ; U2.12@56.179,106.599 60.152,106.599 v1(60.198,106.553)
  Bottom Layer w0.3: v1(34.798,116.078) 34.798,108.966 36.576,107.188 49.53,107.188 v1(50.546,106.172) ; v1(51.562,102.108) 55.753,102.108 v1(60.198,106.553)
NetU3_1: U3.1 X1.1 | length 18.4
  Top Layer w0.5: X1.1@32.258,98.298 50.419,98.298 U3.1
NetU3_2: U3.2 X1.2 | length 18.2
  Top Layer w0.5: X1.2 U3.2@50.165,95.504
ONEWIRE: U2.29
PDI: P4.6 U2.2 | length 18.6
  Top Layer w0.3: P4.6 P4.6@51.181,122.555 ; U2.2 57.03,114.674 58.166,113.538 v1(59.055,113.538)
  Bottom Layer w0.3: P4.6 53.467,120.015 53.467,114.808 54.737,113.538 v1(59.055,113.538)
PDO: P4.5 U2.3 | length 8.9
  Top Layer w0.3: P4.5 52.578,118.364 52.578,116.332 55.036,113.874 U2.3
RES: P4.3 R2.2 SW56.2 U2.20 | length 65.6
  Top Layer w0.3: P4.3 52.451,113.411 52.451,102.87 55.372,99.949 ; v1(55.372,98.298) 55.372,99.949 ; U2.20@60.198,102.108 60.198,100.711 59.436,99.949 55.372,99.949
  Bottom Layer w0.3: SW56.2 51.308,104.14 52.705,105.537 52.705,113.411 51.181,114.935 P4.3
RXD: SL1.5 U2.27 | length 25.2
  Top Layer w0.2: SL1.5 65.654,88.138 70.866,88.138 72.009,89.281 72.009,96.513 70.478,98.044 67.818,98.044 65.754,100.108 U2.27
SCK: P4.4 U2.11 | length 13
  Top Layer w0.3: P4.4 50.927,116.967 53.975,113.919 53.975,108.204 54.705,107.474 U2.11
SCL: R4.1 U2.25 U3.6 | length 16
  Top Layer w0.3: v1@64.154,99.041 U2.25
  Bottom Layer w0.3: R4.1 U3.6 59.436,94.869 59.436,97.917 60.325,98.806 v1(64.389,98.806)
SDA: R5.1 U2.26 U3.5 | length 21
  Top Layer w0.3: U2.26 64.954,100.019 66.421,98.552 v1(66.421,97.536)
  Bottom Layer w0.3: U3.5 57.912,90.805 58.293,91.186 63.119,91.186 63.881,91.948 63.881,94.234 66.294,96.647 66.294,97.409 v1(66.421,97.536)
  Bottom Layer w0.5: R5.1 U3.5@57.912,90.805
SEL_4A_COM: U2.35
SEL_4B_COM: U2.36
SEL_16A_COM: U2.37 U4.10 U5.10 U6.10 U7.10 | length 189.2
  Top Layer w0.2: U2.37 70.098,106.674 69.469,106.045 69.469,103.759 72.39,100.838 83.312,100.838 86.233,97.917 86.233,84.201 89.408,81.026 v1(108.585,81.026) v1(120.65,81.026) ; v1(118.491,108.458) 119.253,107.696 v1(119.253,102.362) ; U5.10 166.878,84.709 166.624,84.963 166.37,84.963 165.608,85.725 165.608,102.108 167.005,103.505 U7.10
  Bottom Layer w0.2: v1(108.585,81.026) 108.585,87.757 117.856,97.028 U6.10 117.856,100.838 119.253,102.235 v1@119.253,102.87 ; U4.10 117.983,108.585 118.491,108.077 v1(118.491,108.458) ; v1(120.65,81.026) 121.031,80.645 165.735,80.645 166.878,81.788 U5.10
SEL_16B_COM: U2.38 U4.11 U5.11 U6.11 U7.11 | length 179.8
  Top Layer w0.2: U2.38@71.436,107.442 76.581,107.442 85.217,116.078 v1(100.711,116.078) ; v1(108.204,102.108) 108.204,102.03 108.055,101.881 107.747,101.881 107.747,106.223 115.443,113.919 U4.11 ; v1(111.864,96.901) 111.864,97.005 111.887,97.028 113.792,97.028 115.316,98.552 U6.11 U6.11@115.316,99.568 ; U5.11 168.148,85.471 168.148,103.251 U7.11
  Bottom Layer w0.2: v1(100.711,116.078) 101.854,117.221 114.427,117.221 115.443,118.237 U4.11 115.443,122.555 117.348,124.46 163.576,124.46 165.735,122.301 165.735,111.76 169.545,107.95 U7.11 ; v1(108.204,102.108) 108.204,102.03 108.055,101.881 107.796,101.881 107.823,101.854 107.823,100.942 v1(111.864,96.901)
SEL_16C_COM: U2.39 U4.14 U5.14 U6.14 U7.14 | length 205.9
  Top Layer w0.2: v1(109.474,115.57) 109.347,115.697 109.347,121.285 112.014,123.952 141.732,123.952 v1@142.367,123.317 ; v1@147.955,123.444 149.098,124.587 172.593,124.587 175.006,122.174 175.006,96.774 174.244,96.012 170.307,96.012 169.418,96.901 U5.14 ; U7.14 169.545,124.587
  Top Layer w0.3: v1(68.961,108.331) 69.018,108.274 U2.39 ; U6.14 110.744,88.773 110.744,100.076 115.316,104.648 U4.14 v1(115.443,110.617)
  Bottom Layer w0.2: v1(109.474,115.57) 114.173,115.57 115.443,114.3 v1(115.443,110.617) ; v1(142.367,123.19) 147.828,123.19 v1(147.955,123.317)
  Bottom Layer w0.3: v1(68.961,108.331) 71.12,110.49 77.217,110.49 79.799,107.908 90.144,107.908 93.234,110.998 v1@115.443,110.998
SEL_16D_COM: U2.40 U4.13 U5.13 U6.13 U7.13 | length 179.6
  Top Layer w0.2: 86.995,100.711 108.966,100.711 ; U4.13@113.03,104.775 v1(113.03,108.585) ; v1(158.115,122.428) 158.115,117.602 158.877,116.84 173.863,116.84 ; U5.13 173.863,101.346 173.863,116.84 ; U7.13 173.863,118.11 173.863,116.84
  Top Layer w0.254: 107.939,100.827 cw(c108.458,100.319) 108.966,100.838 ; 107.95,100.838 ccw(c108.452,101.351) 108.966,100.849 ; 108.966,99.949 cw(c109.664,100.393) 109.22,101.092 ; 109.601,101.346 ccw(c109.601,100.722) 108.977,100.722 ; 109.728,101.346 cw(c109.04,101.409) 108.977,100.722 ; 108.977,100.722 cw(c108.458,100.214) 108.966,99.695 cw(c109.485,100.203) 108.977,100.722
  Top Layer w0.3: U2.40@71.525,108.953 U2.40 74.314,109.074 v1(74.676,108.712) ; v1(75.311,105.664) 77.724,103.251 84.455,103.251 86.995,100.711 ; U6.13 109.093,87.884 109.093,100.838 109.601,101.346 U4.13
  Bottom Layer w0.2: v1(113.03,108.585) 115.316,108.585 116.713,109.982 116.713,121.412 117.348,122.047 158.115,122.047 v1(158.115,122.428) ; U5.13 U5.13@171.958,99.822 ; U7.13@172.085,119.253 U7.13
  Bottom Layer w0.3: v1(74.676,108.712) 75.438,107.95 v1@75.438,105.664
TXD: SL1.1 U2.28 | length 21.6
  Top Layer w0.2: U2.28 66.554,100.324 68.199,98.679 71.12,98.679 72.898,96.901 72.898,88.519 71.358,86.979 SL1.1
VCC: C4.1 C5.1 C9.1 C133.1 J1.2 J1.15 P1.1 P4.2 R1.2 R2.1 R3.2 R4.2 R5.2 SL1.7 U1.3 U2.21 U2.52 U2.62 U2.64 U3.8 U4.24 U5.24 U6.24 U7.24 U1024.3 | length 398.2
  Top Layer w0.2: v1(46.101,124.206) 46.101,125.73 46.736,126.365 ; v1(53.34,95.885) 54.991,95.885 57.404,98.298 U3.8 ; 55.499,126.365 55.499,120.523 57.754,118.268 U2.64@57.754,117.348 ; U2.64@57.658,117.856 57.658,118.364 58.039,118.745 58.928,118.745 59.354,118.319 U2.62 ; U4.24 140.843,102.235 143.637,99.441 U5.24 143.764,99.441 143.383,99.06 143.383,86.995 140.716,84.328 U6.24 140.716,83.947 143.891,80.772 174.498,80.772 176.53,82.804 176.53,123.19 173.355,126.365 142.621,126.365 ; U7.24 145.542,121.285 145.542,126.365
  Top Layer w0.3: 46.736,126.365 71.12,126.365 ; U3.8@58.039,98.298 59.182,98.298 60.954,100.07 U2.21 ; SL1.7 64.479,84.455 74.041,84.455 C9.1@76.391,86.804 ; v1(68.834,113.792) 68.453,113.792 67.354,114.891 U2.52 67.354,121.202 68.58,122.428 70.612,122.428 71.12,122.936 J1.2 71.12,126.365 ; C9.1@76.243,85.725 C9.1@76.595,85.373 ; 145.542,126.365 71.12,126.365
  Top Layer w0.5: P1.1 31.622,118.365 R1.2 31.876,113.919 40.132,113.919 41.777,115.564 U1.3 41.777,116.326 42.926,117.475 v1(46.101,117.475) ; P4.2@50.419,112.395 48.895,112.395 47.752,111.252 47.752,104.14 53.34,98.552 v1(53.34,95.885) ; U1024.3 102.087,111.358 ; U1024.3@102.235,109.728 102.235,112.268 104.14,114.173 J1.15 104.14,126.111
  Bottom Layer w0.2: v1(46.101,124.206) v1(46.101,117.475) 46.101,117.221 P4.2
  Bottom Layer w0.3: 53.467,87.884 54.372,86.979 SL1.7
  Bottom Layer w0.5: 53.467,87.884 R2.1
XTAL1: C1.1 U2.24 Y1.2 | length 16.2
  Top Layer w0.3: U2.24 63.304,101.774 63.304,97.869 63.823,97.35 63.823,97.34 65.024,96.139 68.58,96.139 v1(69.342,96.901)
  Bottom Layer w0.2: C1.1 69.652,96.83 69.723,96.901 Y1.2
XTAL2: C2.1 U2.23 Y1.1 | length 9.8
  Top Layer w0.2: v1(61.849,96.901) 62.554,97.606 U2.23
  Bottom Layer w0.2: v1(61.849,96.901) 62.738,96.901 C2.1@62.738,93.218
pads on no net: J1.7 J1.8 J1.9 J1.10 S32.3 S32.M2 S201.M2 SL1.2 SL1.4 SL1.6 SL1.8 U2.1 U2.4 U2.5 U2.6 U2.7 U2.8 U2.9 U2.10 U2.14 U2.15 U2.16 U2.17 U2.18 U2.19 U2.31 U2.32 U2.33 U2.34 U2.41 U2.42 U2.43 U2.54 U2.55 U2.56 U2.57 U1024.2
copper on no net: | length 0.2
  Top Layer w0.05: 35.702,91.044 35.814,90.932

## Polygon pours and split planes (outlines as drawn)
GND on Top Layer "Top Layer-No Net" (hatched 45Degree grid 0.508 track 0.203, pour order 4): 178.689,76.327 183.769,81.407 183.896,81.407 183.896,125.095 179.197,129.794 63.5,129.794 62.865,129.159 57.15,134.874 25.019,134.874 24.765,135.128 19.812,130.175 19.812,129.667 19.812,78.994 20.574,78.232 22.606,76.2 177.8,76.2
GND on Bottom Layer "Top Layer-No Net" (solid, pour order 6): 178.816,76.2 179.07,76.2 184.023,81.153 184.15,81.28 184.15,124.841 184.15,125.603 179.705,130.048 63.246,130.048 62.484,130.048 57.15,135.382 56.769,135.763 24.765,135.763 24.765,135.255 19.304,129.794 19.558,129.54 19.558,79.756 19.558,78.994 22.098,76.454 22.352,76.2 177.8,76.2

## Other copper
Top Layer:
  rectangle net 3.3V: 91.694,107.442 97.282,108.966
  rectangle net GND: 41.91,118.491 49.149,122.174
  rectangle net VCC: 54.991,120.904 56.261,125.476
  rectangle net VCC: 41.402,114.935 46.736,117.983
  rectangle net NetC3_1: 42.672,100.584 43.561,112.395
  rectangle net GND: 34.671,96.139 42.291,97.536
  rectangle net VCC: 31.115,113.538 33.782,120.142
  rectangle net NetLED1_1: 29.083,110.871 30.48,114.808
  rectangle net NetLED1_1: 26.67,110.871 30.48,112.395
  rectangle net NetLED1_1: 28.702,111.76 29.845,112.776
  rectangle net GND: 25.527,114.3 28.321,120.142
  rectangle net NetD51_A: 26.797,121.285 31.75,123.444
  rectangle net NetC3_2: 26.797,123.952 31.75,126.238
  rectangle net GND: 37.592,127 41.529,127.889
  rectangle net NetS201_3: 34.163,115.443 35.433,129.413
  rectangle net GND: 46.228,130.556 47.752,132.969
  rectangle net GND: 46.101,130.556 47.752,131.318
  rectangle net GND: 40.009,130.175 47.752,130.81
  rectangle net GND: 45.974,130.556 46.609,131.064
  rectangle net GND: 45.847,130.683 46.355,131.064
  rectangle net NetS201_1: 40.259,128.524 52.324,129.667
  rectangle net VCC: 45.212,123.698 55.594,126.492
  rectangle net VCC: 102.997,113.157 105.029,126.365
  rectangle net VCC: 100.711,108.966 105.029,114.3
  rectangle net VCC: 70.104,122.301 72.136,126.365
  rectangle net SEL_16D_COM: 157.988,112.522 173.863,117.602
  rectangle net SEL_16C_COM: 168.529,118.618 170.561,124.46
  rectangle net SEL_16C_COM: 149.098,123.698 172.593,124.587
  rectangle net SEL_16D_COM: 107.188,99.314 109.728,100.711
  rectangle net SEL_16D_COM: 107.188,98.806 109.982,100.965
  rectangle net SEL_16B_COM: 114.427,96.266 116.205,100.33
  rectangle net SEL_16B_COM: 111.379,96.266 114.427,97.663
  rectangle net HALL15: 122.047,103.251 124.079,110.744
  rectangle net HALL14: 124.841,103.251 126.365,109.601
  rectangle net HALL16: 119.761,103.251 121.412,108.839
  rectangle net HALL13: 127.127,104.013 128.524,110.236
  rectangle net HALL1: 119.38,113.538 121.539,121.031
  rectangle net HALL29: 155.829,114.046 157.353,120.269
  rectangle net VCC: 139.7,83.058 142.113,85.598
  rectangle net VCC: 142.24,95.377 144.78,100.838
  rectangle net HALL37: 153.543,83.693 154.94,91.948
  rectangle net GND: 79.883,78.359 84.328,92.583
  rectangle net GND: 51.181,78.74 83.947,80.772
  rectangle net GND: 58.293,114.935 66.554,115.824
  rectangle net HALL35: 158.496,83.058 159.766,89.662
  region net GND: 103.378,105.664 103.378,103.505 102.108,102.235 89.281,102.235 89.281,102.362 86.868,104.775 86.868,110.236 88.9,110.236 90.805,108.331 90.678,108.204 90.678,106.426 93.345,106.426 94.615,105.156 102.87,105.156
  region net VCC: 56.197,125.222 54.991,125.222 53.848,126.365 57.34,126.365
  region net GND: 42.672,123.444 43.942,122.174 43.942,121.92 42.926,121.92 42.672,121.666
  region net GND: 48.768,117.729 47.625,118.872 48.641,118.872 48.641,118.11 48.768,117.983
  region net GND: 48.768,118.237 48.514,118.237 48.641,118.11 48.768,118.11
  region net GND: 60.357,104.013 60.325,103.632 61.722,102.743 61.754,105.315 60.198,104.521 60.452,104.013
  region net GND: 66.548,114.173 65.722,114.998 66.421,115.697 66.554,115.697 66.554,114.3
  region net GND: 61.722,113.919 62.738,114.935 60.706,114.935 61.595,114.046 61.754,114.046
  region net VCC: 59.309,118.491 57.531,118.491 55.499,120.523 55.499,122.301
  region net GND: 58.293,114.935 59.443,114.935 58.554,115.824 57.404,115.824
  region net GND: 39.504,129.674 40.513,130.683 38.608,130.683
  region net VCC: 55.499,120.523 55.626,120.396 55.626,120.269 54.991,120.904 55.372,120.904 55.499,121.031
  region net GND: 49.149,122.174 50.038,121.285 49.149,120.396 44.704,120.396 41.465,123.634 42.926,125.095 45.847,122.174
  region net VCC: 46.99,115.189 45.974,114.173 37.465,114.046 41.402,117.983 46.99,117.983
  region net NetC3_1: 45.593,112.395 46.736,111.252 46.736,100.457 45.72,99.441 40.005,99.441 38.862,100.584 38.862,108.585 42.672,112.395
  region net GND: 21.717,108.077 21.463,108.331 21.463,109.982 21.844,110.363 37.846,110.363 37.846,109.347 38.735,109.22 37.846,108.077
  region net GND: 42.926,127.508 42.926,125.095 36.068,125.603 36.068,129.413 39.878,127.889 42.545,127.889
  region net GND: 39.497,128.651 40.386,127.762 38.608,127.762
  region net NetS201_3: 31.242,132.461 31.242,132.334 34.163,129.413 35.433,129.413 32.004,132.842 31.877,132.715 31.496,132.715
  region net GND: 35.052,130.683 34.925,130.556 37.592,127.889 38.862,127.889 39.751,127.762 39.751,130.683
  region net VCC: 54.991,120.904 52.07,123.825 55.245,123.825 55.499,124.079
  region net NetQ1_3: 77.851,118.745 74.58,115.474 70.612,115.474 70.612,117.094 72.263,118.745
  region net VCC: 103.505,116.967 100.711,114.046 103.632,114.046 103.632,115.189
  region net VCC: 72.136,125.73 72.771,126.365 69.215,126.365 70.231,125.73 70.612,125.857
  region net SEL_16C_COM: 149.098,123.698 148.209,122.809 147.955,123.063 147.955,123.444 149.098,124.587
  region net SEL_16C_COM: 168.656,121.793 166.243,124.206 166.624,124.587 172.593,124.587 175.006,122.174 175.006,121.793
  region net SEL_16C_COM: 175.006,120.523 173.228,122.301 174.879,122.301 174.879,122.111 175.006,121.983
  region net SEL_16C_COM: 170.18,120.904 170.307,120.777 171.45,122.047 171.323,122.174 170.053,122.174 170.053,121.285 170.434,120.904
  region net SEL_16D_COM: 107.188,98.806 108.966,97.028 108.966,99.441 108.331,98.806
  region net SEL_16D_COM: 109.053,97.369 109.982,98.298 109.982,101.6 109.855,101.727 109.474,101.346 108.839,101.346 108.458,100.965 107.188,100.965
  region net VCC: 146.812,126.238 146.685,126.365 144.399,126.365 144.399,126.111 145.542,124.968
  region net SEL_16D_COM: 173.99,117.221 173.863,117.094 173.355,117.602 171.196,117.602 171.196,120.523 171.831,121.158 173.482,121.158 173.99,120.65
  region net SEL_16D_COM: 173.863,109.982 173.863,113.411 171.196,113.411 171.069,113.284 171.069,112.776
  region net SEL_16D_COM: 158.115,118.237 159.004,117.602 159.004,117.475 158.242,117.475 158.115,117.602
  region net GND: 80.137,84.582 75.692,80.137 76.073,79.756 82.931,79.756 82.931,84.455 83.058,84.582
  region net GND: 51.235,81.557 53.613,78.74 49.784,78.74
  region net VCC: 78.613,85.725 75.057,82.169 62.611,82.169 60.706,84.074 60.706,87.757 61.087,88.138 62.484,88.138 62.992,87.63 62.992,85.852 63.082,85.852 64.479,84.455 71.501,84.455 75.819,88.773
  region net GND: 29.972,108.712 27.94,106.68 27.559,106.68 27.559,108.458 26.924,109.093 29.337,109.093
  region net GND: 66.548,110.998 65.659,111.887 62.738,111.887 61.754,110.871 61.754,114.903 61.722,114.935 66.421,114.935 67.818,113.538 67.818,110.998
  region net GND: 66.421,116.332 65.786,115.697 66.487,115.697 66.487,116.266 66.554,116.332
  region net HALL35: 157.797,91.504 159.639,89.662 158.496,89.662 157.099,91.059 157.353,91.059
  text "KharazmiFestival" at 89.916,90.043 h2
  text "RoseResearchTeam" at 89.154,86.995 h2
  text "SamrtChessVersion3.1" at 30.226,86.614 h1.8
  text "DesignedByEhsanShaghaei" at 27.432,84.709 h1.9
  text "AllRightsReserved(c)2015 R2T Company >>EhsanShaghaei" at 180.721,84.328 h1.5 r90
  text "SmartChess" at 91.948,84.074 h2
  text "Advisor:HamedJafarzadeh" at 28.575,82.423 h1.8
  text "www.R2T.ir" at 27.686,80.264 h1.8
  text "Date:29/07/2015" at 37.211,80.264 h1.8
Bottom Layer:
  rectangle net GND: 34.544,94.488 42.418,98.298
  rectangle net VCC: 52.705,90.17 53.975,99.187
  rectangle net GND: 64.77,92.202 67.564,93.853
  rectangle net VCC: 52.705,85.979 62.992,88.265
  rectangle net VCC: 52.451,86.106 54.229,99.441
  rectangle net XTAL1: 68.834,90.932 73.406,97.79
  rectangle net XTAL2: 60.071,92.075 63.246,97.282
  rectangle net NetC3_2: 34.925,120.904 42.926,127.381
  rectangle net NetC3_2: 27.051,124.46 35.814,127.254
  rectangle net NetD51_A: 27.305,120.904 33.655,123.317
  rectangle net NetD51_A: 32.258,104.902 33.655,122.301
  rectangle net NetC3_1: 37.211,111.76 43.561,119.253
  rectangle net NetC3_1: 40.386,111.125 45.974,114.046
  rectangle net GND: 109.728,119.126 113.792,126.365
  region net GND: 67.564,96.901 67.945,96.52 67.945,94.234 68.453,93.599 68.453,90.043 66.294,91.821 65.024,91.821 64.516,92.329 64.516,93.853
  region net NetB2_1: 50.165,93.218 39.624,93.218 37.846,91.44 37.846,89.916 46.863,89.916
  text "Created By Dr.EhsanShaghaei @R2T" at 68.453,80.518 h2

## Silkscreen, mask and mechanical layers (free items; w line width, h text height)
Mechanical 1:
  lines w1: 182.245,79.629 184.15,81.534 184.15,81.788 178.943,76.581 22.098,76.581 19.685,78.994 19.685,130.429 24.638,135.382 57.277,135.382 62.992,129.667 179.324,129.667 184.023,124.968 184.023,81.026

## Text inside footprints (layer, text, board x,y; h text height)
B1: Bottom Overlay "+" at 84.92,97.712 h1.7 r270
P2: Top Overlay "1" at 32.639,125.603 h1.27 r180; Top Overlay "2" at 33.147,123.063 h1.27 r180; Top Overlay "4" at 26.543,123.063 h1.27 r180; Top Overlay "3" at 26.543,125.603 h1.27 r180
P5: Bottom Overlay "1" at 117.729,115.062 h1.27 r180; Bottom Overlay "2" at 117.729,112.522 h1.27 r180; Bottom Overlay "29" at 157.353,115.062 h1.27 r180; Bottom Overlay "30" at 157.353,112.522 h1.27 r180
P6: Bottom Overlay "1" at 164.973,90.805 h1.27; Bottom Overlay "2" at 164.973,93.345 h1.27; Bottom Overlay "29" at 125.349,90.805 h1.27; Bottom Overlay "30" at 125.349,93.345 h1.27
P7: Bottom Overlay "1" at 120.523,89.789 h1.27; Bottom Overlay "2" at 121.031,92.329 h1.27; Bottom Overlay "4" at 114.427,92.329 h1.27; Bottom Overlay "3" at 114.427,89.789 h1.27
Q1: Top Overlay "1" at 85.312,111.1 h0.7 r270; Top Overlay "3" at 85.217,113.868 h0.7 r270
SL1: Bottom Overlay "8" at 60.431,89.011 h1.27; Bottom Overlay "7" at 60.431,86.471 h1.27; Bottom Overlay "1" at 71.607,86.471 h1.27
X1: Top Overlay "32768" at 35.052,96.012 h1.5